# Altium PCB DRLTransistor.PcbDoc
Units mm, origin at the board's own origin, x right, y up, seen from the top; angles counter-clockwise.
Board outline 152.4 x 101.6 mm, 2 copper layers (Top Layer, Bottom Layer); 9 components, 8 nets, 28 pads, 0 vias.
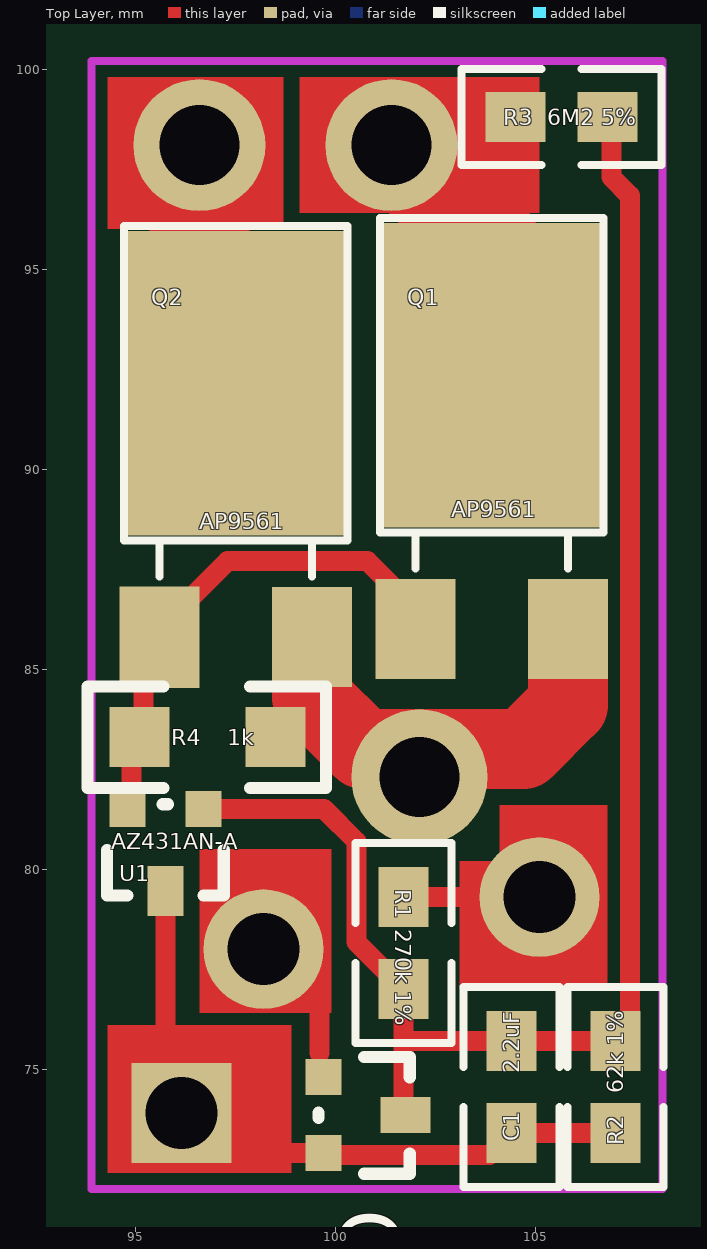
[diagram p0: Top Layer view]
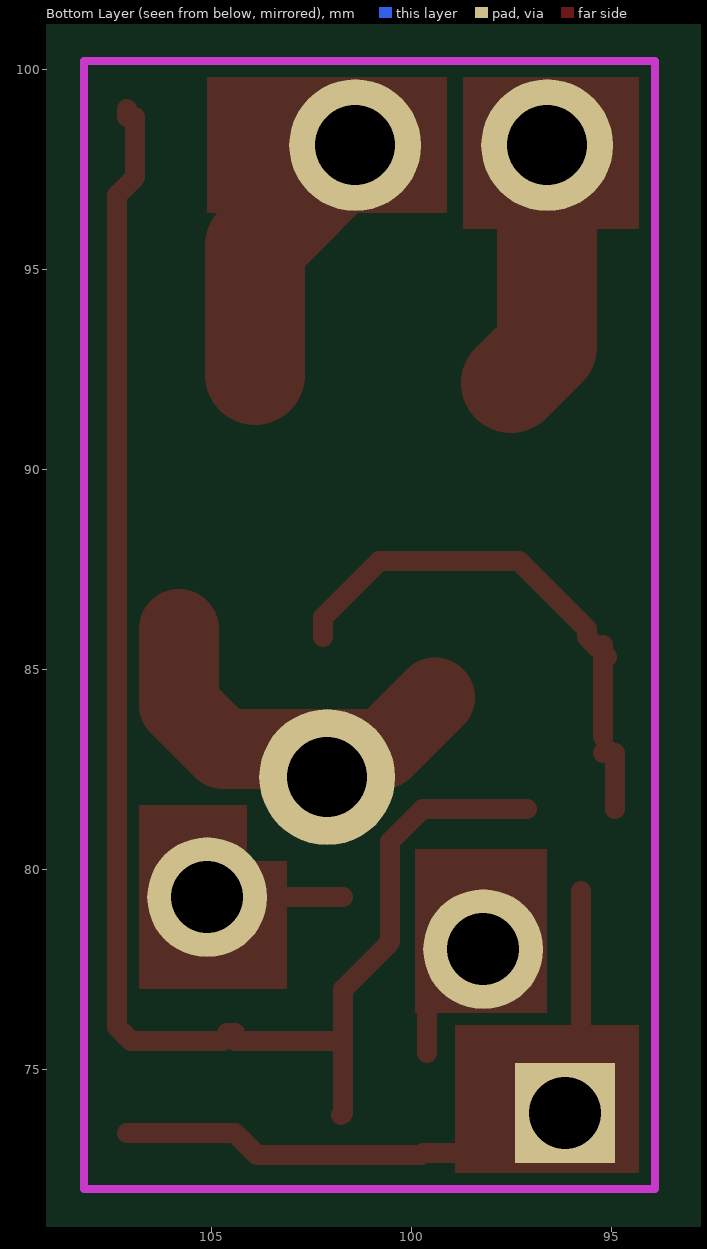
[diagram p1: Bottom Layer view, seen from below]

## Layer stack, top to bottom
Top Layer: signal copper 0.0356
Dielectric: dielectric 0.32, FR-4, Dk 4.8
Bottom Layer: signal copper 0.0356

## Board outline
25.4,25.4 177.8,25.4 177.8,127 25.4,127

## Design rules (kind name [scope] priority, off if disabled: settings)
Clearance [All] p1: gap=0.3
ComponentClearance [All] p1 off: gap=0 collisioncheckmode=3 verticalgap=0.254 showdistances=FALSE
PolygonConnect [All] p1: connectstyle=Relief reliefconductorwidth=0.254 reliefentries=4 polygonreliefangle="90 Angle"
RoutingVias [All] p1: holewidth=0.711 width=1.27 viastyle="Through Hole" minholewidth=0.711 minwidth=1.27 maxholewidth=0.711 maxwidth=1.27
SilkscreenOverComponentPads [All] p1: minsilkscreentomaskgap=0.254
SolderMaskExpansion [All] p1: expansion=0.102
Width [All] p1: maxlimit=5 minlimit=0.25 preferedwidth=0.25
26 further rules are at their usual default settings.

## Components (designator, comment, footprint, x,y, rotation, side; value= is the part's Value field where it differs from the comment)
C1 "2.2uF" 0805 104.4,75.7 r270 top
Q1 "AP9561" D-Pack#1 102,86 r90 top
Q2 "AP9561" D-Pack#2 95.6,85.8 r90 top
Q3 "DTC114YKAT" SOT-23 99.7,74.8 r270 top
R1 "270k 1%" 0805 101.7,79.3 r270 top
R2 "62k 1%" 0805 107,75.7 r270 top
R3 "6M2 5%" 0805 104.5,98.8 r0 top
R4 "1k" 1206 98.5,83.3 r180 top
U1 "AZ431AN-A" SOT-23 96.7,81.5 r180 top

## Footprints (in the part's own frame and the unit in brackets; to place one, negate y for a bottom-side part, rotate by r counter-clockwise, add the part's x,y. Pads: shape width x height; smd on the part's side, far side on the other; paste and mask are expansions set on the pad)
0805 [mm]
  rect 1.5x1.25 smd: 1(0,0) 2(2.3,0)
  silkscreen extent -1.35,-1.2 3.65,1.2
1206 [mm]
  rect 1.5x1.5 smd: 1(0,0) 2(3.4,0)
  silkscreen extent -1.27,-1.27 4.7,1.27
D-Pack#1 [mm]
  rect 2.5x2 smd: 1(0,0) 3(0,-3.81)
  rect 7.62x5.588 smd: 2(6.35,-1.905)
  silkscreen extent 1.52,-4.7 10.29,0.89
D-Pack#2 [mm]
  rect 2.54x2 smd: 1(0,0)
  rect 7.62x5.588 smd: 2(6.35,-1.905)
  rect 2.5x2 smd: 3(0,-3.81)
  silkscreen extent 1.52,-4.7 10.29,0.89
SOT-23 [mm]
  rect 0.9x0.9 smd: 1(0,0) 3(1.9,0)
  rect 0.9x1.25 smd: 2(0.95,2.05)
  silkscreen extent -0.51,-0.13 2.41,2.16

## Part data
C1: library part CAP, "Capacitor"
Q1 Q2: library part "MOSFET P"
Q3: library part NPN1, "NPN Transistor"
R1 R2 R3 R4: library part Res1, "Resistor"
U1: library part TL431

## Free pads (board coordinates)
  rect 2.5x2.5 hole 1.8: 0(96.15,73.9)
  round 3.3 hole 2: 0(96.6,98.1) 0(101.4,98.1)
  round 3 hole 1.8: 0(98.2,78) 0(105.1,79.3)
  round 3.4 hole 2: 0(102.1,82.3)

## Nets (pads, with @x,y where several pads share a name; then routed paths per layer and width w, separated by ;. In a path a pad name is that pad's centre, name@x,y a point inside that pad or via, vN(x,y) a via of type N, cw(c..) or ccw(c..) an arc to the next point about the centre after c; other vN are vias at no path point)
ACC: pad.0@105.1,79.3 R1.1 | length 1.6
  Top Layer w0.5: R1.1 103.3,79.3
CATHODE: Q1.1 Q2.1 R4.2 U1.3 | length 13.1
  Top Layer w0.5: U1.3@94.9,81.5 R4.2@94.9,82.9 ; R4.2@95.1,83 R4.2@95.2,82.9 ; Q2.1@95.1,85.3 Q2.1 95.6,86 97.3,87.7 100.8,87.7 102.2,86.3 102.2,86 Q1.1@102.2,85.8 ; R4.2@95.2,83.3 Q2.1@95.2,85.6
GABARIT: pad.0@98.2,78 Q3.1 | length 3.1
  Top Layer w0.5: pad.0@98.8,78.2 99.6,77.4 99.6,75.4
L: pad.0@96.6,98.1 Q2.2 | length 6.3
  Top Layer w2.5: pad.0@96.6,98.1 96.6,93.055 Q2.2
NetC1_1: C1.1 Q3.2 R1.2 R2.1 R3.2 U1.1 | length 39.9
  Top Layer w0.5: U1.1@97.1,81.5 99.718,81.5 100.525,80.693 100.525,78.175 R1.2 101.7,75.7 ; Q3.2 101.7,73.9 101.7,75.7 ; C1.1 101.7,75.7 ; C1.1@104.4,75.9 C1.1@104.6,75.9 ; C1.1@104.7,75.7 R2.1 107.36,76.06 107.36,96.84 106.9,97.3 R3.2@106.9,98.8 ; R3.2@107.1,98.8 R3.2@107.1,99
PGND: C1.2 pad.0@96.15,73.9 Q3.3 R2.2 U1.2 | length 16.8
  Top Layer w0.5: pad.0@95.75,73.9 U1.2 ; pad.0@96.1,72.9 Q3.3 99.75,72.85 103.85,72.85 C1.2 R2.2 R2.2@107.1,73.4
POWER: pad.0@102.1,82.3 Q1.3 Q2.3 R4.1 | length 9.3
  Top Layer w2: 99.41,84.29 100.7,83 104.7,83 105.81,84.11 Q1.3
R: pad.0@101.4,98.1 Q1.2 R3.1 | length 8.6
  Top Layer w0.5: 103.205,97.505 R3.1
  Top Layer w2.5: pad.0@101.4,98.1 103.905,95.595 Q1.2

## Keep-outs
Keep-Out Layer:
  lines w0.2: 93.9,72 93.9,100.2 108.175,100.2 108.175,72 93.9,72

## Other copper
Top Layer:
  rectangle net ACC: 104.1,78.1 106.8,81.6
  rectangle net GABARIT: 96.6,76.4 99.9,80.5
  region net R: 99.1,99.8 99.1,96.4 105.1,96.4 105.1,99.8
  region net L: 94.3,99.8 94.3,96 98.7,96 98.7,99.8
  rectangle net ACC: 103.1,77 106.8,80.2
  rectangle net PGND: 94.3,72.4 98.9,76.1